# Altium PCB pdb-25.PcbDoc (part 4 of 4)
Units mil, origin at the board's own origin, x right, y up, seen from the top; angles counter-clockwise.
Board outline 5000 x 5500 mil, 4 copper layers (Top Layer, GND, 3V3, Bottom Layer), stack 23.756 mil thick; 410 components, 167 nets, 1014 pads, 884 vias.
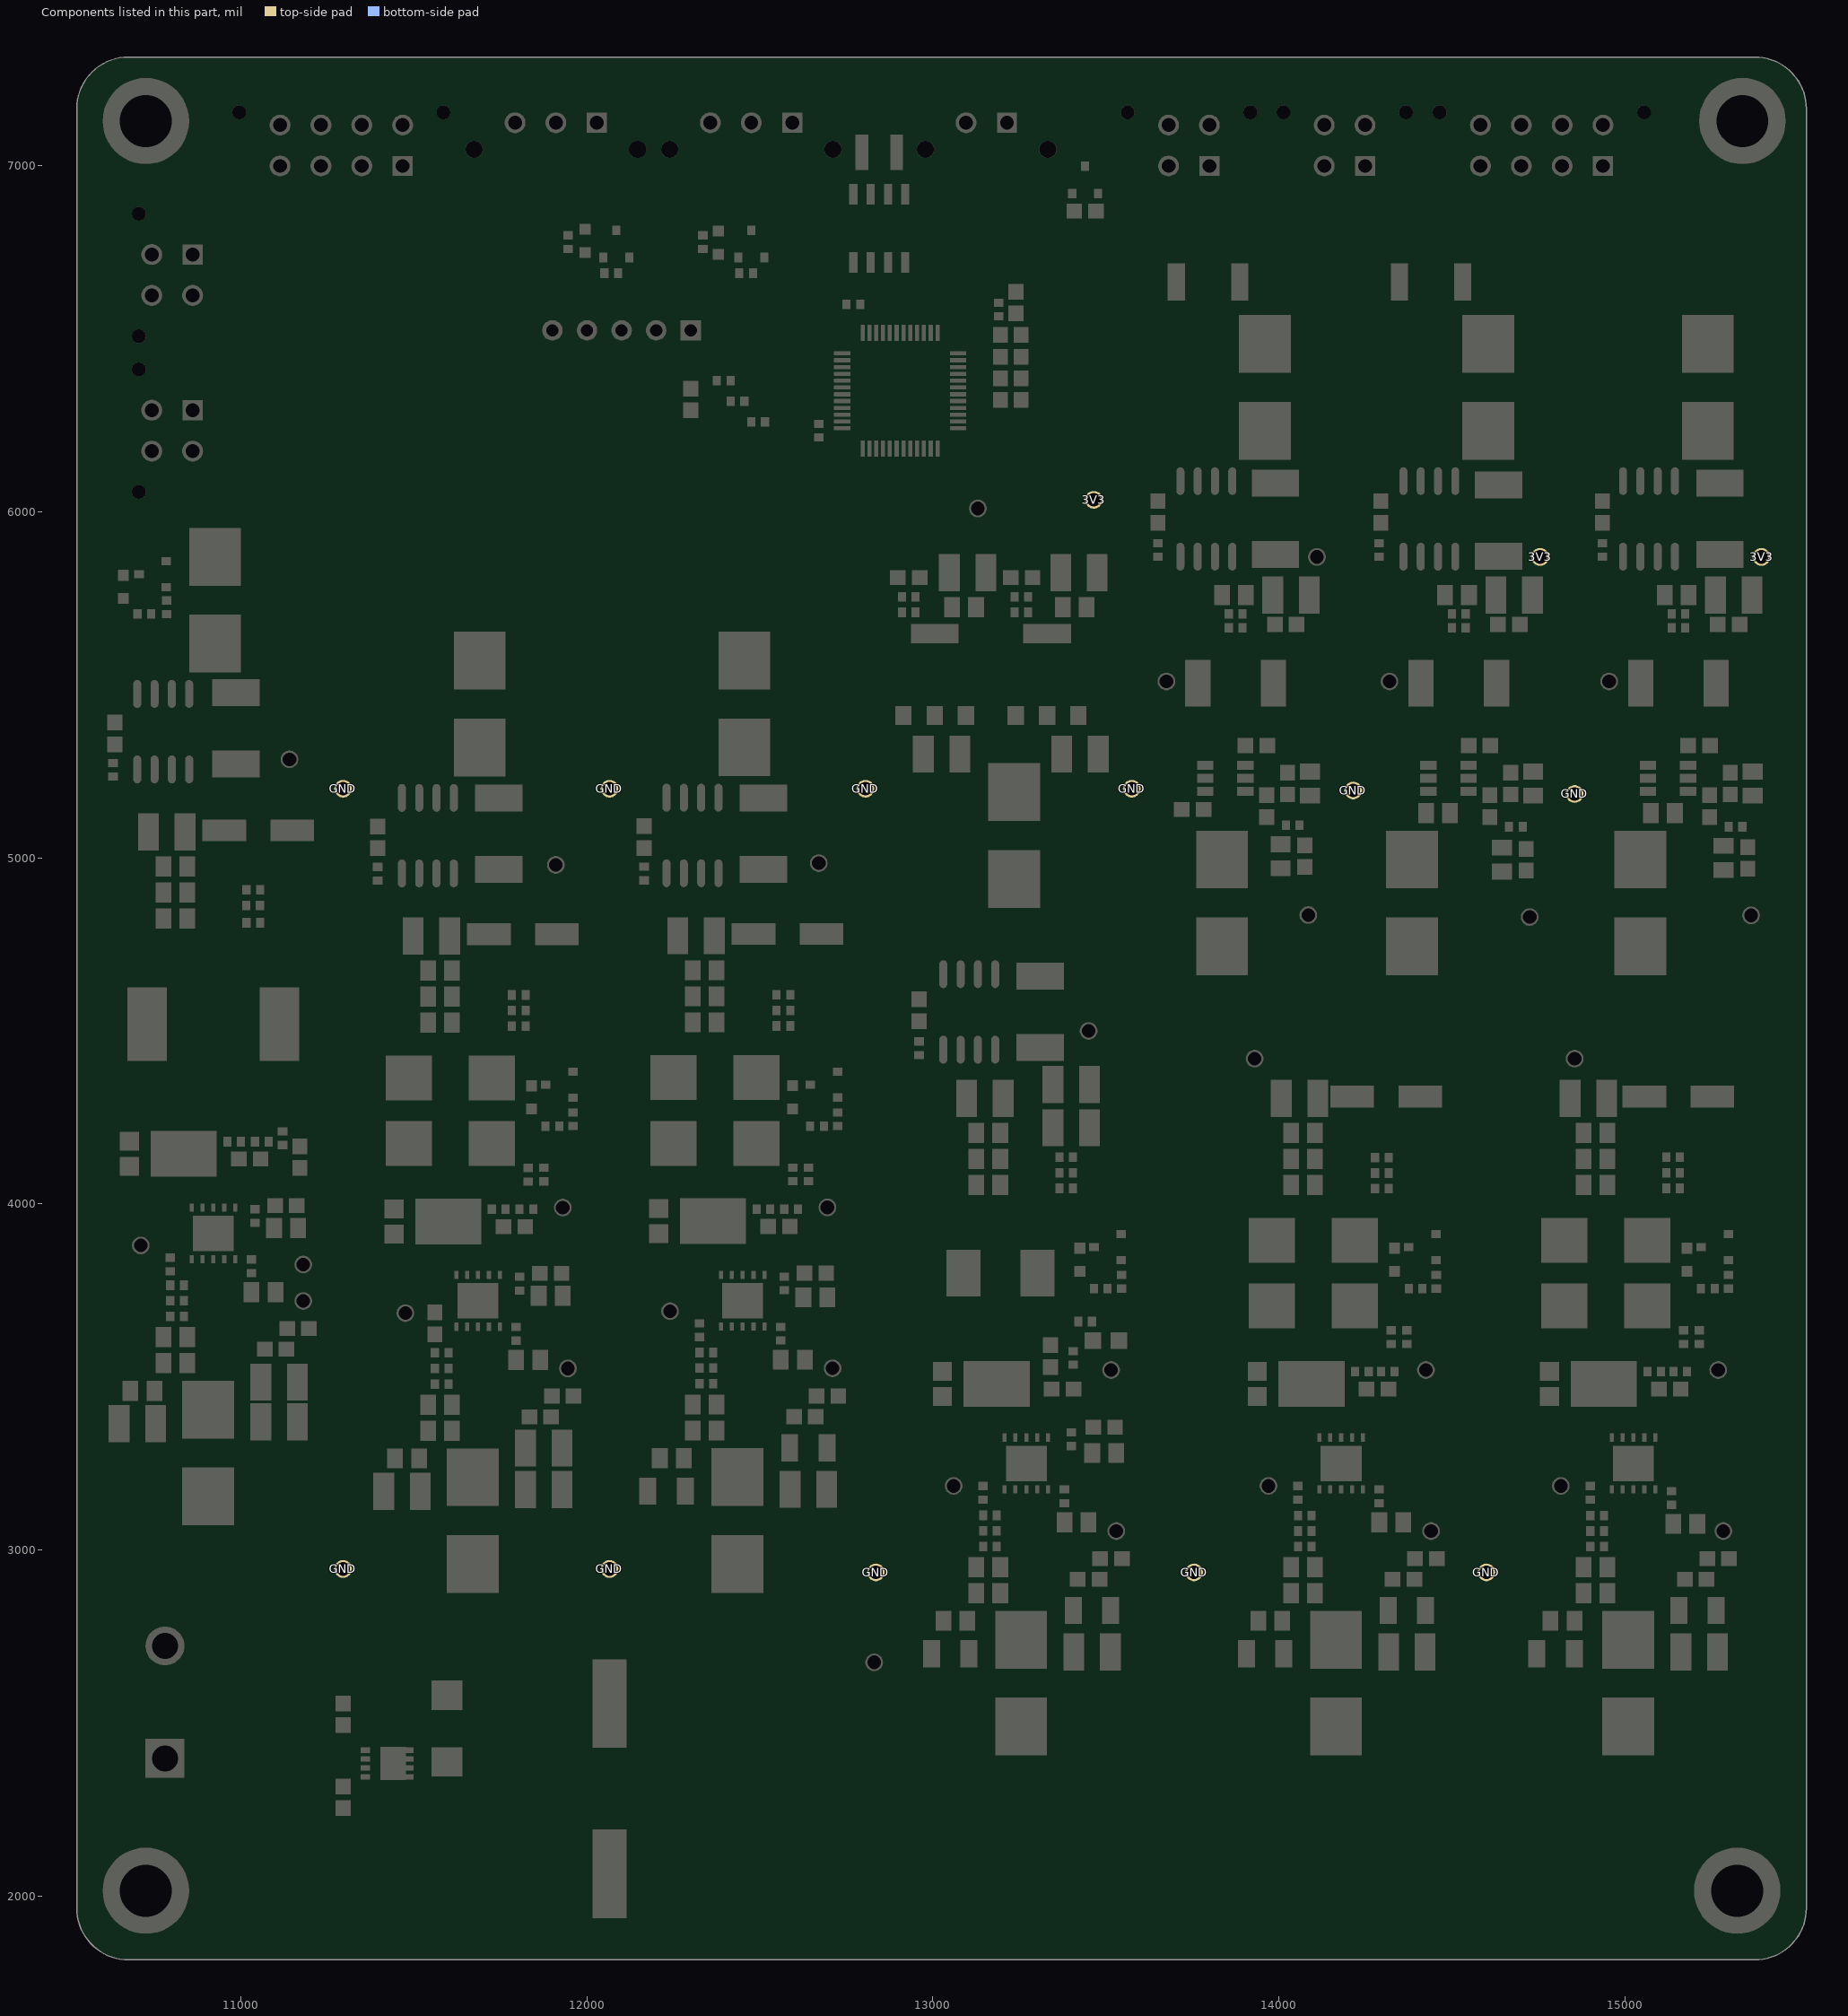
[diagram p6: the components of this part, seen from the top]

## Polygon pours and split planes (outlines as drawn) (continued)
VBAT_REST on Top Layer "VBAT_REST_L01_P119" (solid, remove dead copper, pour order 119): 12350,3323.37 12327.13,3300.5 12265,3300.5 12250,3285.5 12250,3230.5 12250,3120.5 12280,3090.5 12590,3090.5 12625,3125.5 12625,3405.5 12615,3415.5 12570,3415.5 12430,3555.5 12430,3661 12425,3666 12410,3666 12405,3661 12405,3626 12375,3596 12375,3595.5 12370,3590.5 12360,3590.5 12350,3580.5
SW_2 on Top Layer "SW_2_L01_P120" (solid, remove dead copper, pour order 120): 12300,3865.5 12280,3865.5 12265,3880.5 12265,4020.5 12180,4105.5 12180,4430.5 12190,4440.5 12315,4440.5 12325,4430.5 12325,4150.5 12465,4010.5 12465,3870.5 12433,3838.5 12432.5,3838.5 12425,3831 12425,3781 12410,3781 12410,3831 12377.5,3863.5 12350,3863.5 12330,3845.5 12320,3845.5
12V_REST on Top Layer "12V_REST_L01_P121" (solid, pour order 121): 12585,4995 12590,4990 12590,4980 12585,4975 12585,4885 12560,4860 12560,4185.5 12615,4130.5 12615,4095.5 12610,4090.5 12440,4090.5 12420,4110.5 12420,4425.5 12350,4495.5 12350,4705.5 12335,4720.5 12335,4830.5 12355,4850.5 12355,4975.5 12394.5,5015 12575,5015 12585,5005
VBAT_24 on Top Layer "VBAT_24_L01_P129" (solid, remove dead copper, pour order 129): 10820,3518.37 10797.13,3495.5 10735,3495.5 10720,3480.5 10720,3425.5 10720,3315.5 10750,3285.5 11060,3285.5 11095,3320.5 11095,3600.5 11085,3610.5 11040,3610.5 10900,3750.5 10900,3856 10895,3861 10880,3861 10875,3856 10875,3821 10845,3791 10845,3790.5 10840,3785.5 10830,3785.5 10820,3775.5
24V_BUCK on Top Layer "24V_BUCK_L01_P132" (solid, pour order 132): 11060,5300 11069,5291 11069,5279 11060,5270 11060,5200 11030,5170 11030,4775 11170,4635 11170,4415 11160,4405 11140,4405 11125,4390 11115,4390 11100,4405 11060,4405 11050,4415 11050,4564.7 10890,4725.5 10820,4795.5 10820,5005.5 10805,5020.5 10805,5130.5 10825,5150.5 10825,5275.5 10869.5,5320 11050,5320 11060,5310
3V3_AUTONLED_C on Top Layer "3V3_AUTONLED_C_L01_P154" (solid, pour order 154): 15329.65,6010 15345,6025.35 15345,6124.65 15319.65,6150 15319.65,6320 15309.65,6330 15179.65,6330 15169.65,6320 15169.65,6190 15134.65,6155 15134.65,6045 15169.65,6010
3V3_AUTONLED on Top Layer "3V3_AUTONLED_L01_P153" (solid, pour order 153): 15354.65,5859.82 15345,5850.18 15345,5840 15299.65,5794.65 15299.65,5585 15309.65,5575 15309.65,5435 15299.65,5425 15284.65,5425 15274.65,5415 15264.65,5415 15254.65,5425 15239.65,5425 15229.65,5435 15229.65,5570 15164.65,5635 15164.65,5795 15129.65,5830 15129.65,5910 15164.65,5945 15334.65,5945 15344.65,5935 15344.65,5880 15354.65,5870
12V_AUTONLED_FUSED on Top Layer "12V_AUTONLED_FUSED_L01_P151" (solid, pour order 151): 14970,5130.35 14970,4910 14975,4905 15115,4905 15120,4910 15120,5080 15100,5100 15099.65,5105 15099.65,5200 15089.65,5210 15049.65,5210
5V_BUCK on Top Layer "5V_BUCK_L01_P135" (solid, pour order 135): 14075.35,5859.82 14065.71,5850.18 14065.71,5840 14020.35,5794.65 14020.35,5585 14030.35,5575 14030.35,5435 14020.35,5425 14005.35,5425 13995.35,5415 13985.35,5415 13975.35,5425 13960.35,5425 13950.35,5435 13950.35,5570 13885.35,5635 13885.35,5795 13850.35,5830 13850.35,5910 13885.35,5945 14055.35,5945 14065.35,5935 14065.35,5880 14075.35,5870
5V_BUCK_C on Top Layer "5V_BUCK_C_L01_P136" (solid, pour order 136): 14050.35,6010 14060.35,6020 14060.35,6130 14040.35,6150 14040.35,6320 14030.35,6330 13900.35,6330 13890.35,6320 13890.35,6190 13855.35,6155 13855.35,6045 13890.35,6010
SW_5 on Top Layer "SW_5_L01_P134" (solid, pour order 134): 13695.54,5425.17 13695.53,5425.18 13695.53,5445.18 13715.53,5445.18 13715.54,5445.17 13735.35,5464.98 13735.35,5575 13740.35,5580 13805.35,5580 13810.35,5575 13810.35,5435 13745.35,5375 13745.35,5340 13755.35,5330 13755.35,5320 13745.35,5310 13745.35,5254.65 13755,5245 13815.35,5245 13820.35,5240 13820.35,5220 13815.35,5215 13740.35,5215 13680.35,5275 13680.35,5409.98
12V_AUTONLED on Top Layer "12V_AUTONLED_L01_P128" (solid, pour order 128): 14930,4380 14930,4400 14935,4405 14955,4405 14970,4420 14970,4830 14980,4840 15110,4840 15120,4830 15120,4470 15135,4455 15135,3715 15190,3660 15190,3625 15185,3620 15015,3620 14995,3640 14995,3955 14925,4025 14925,4235 14910,4250 14910,4360
SW_0 on Top Layer "SW_0_L01_P127" (solid, remove dead copper, pour order 127): 14875,3395 14855,3395 14840,3410 14840,3550 14755,3635 14755,3960 14765,3970 14890,3970 14900,3960 14900,3680 15040,3540 15040,3400 15008,3368 15007.5,3368 15000,3360.5 15000,3310.5 14985,3310.5 14985,3360.5 14952.5,3393 14925,3393 14905,3375 14895,3375
VBAT_AUTON on Top Layer "VBAT_AUTON_L01_P126" (solid, remove dead copper, pour order 126): 14925,2852.87 14902.13,2830 14840,2830 14825,2815 14825,2760 14825,2650 14855,2620 15165,2620 15200,2655 15200,2935 15190,2945 15145,2945 15005,3085 15005,3190.5 15000,3195.5 14985,3195.5 14980,3190.5 14980,3155.5 14950,3125.5 14950,3125 14945,3120 14935,3120 14925,3110
SW_1 on Top Layer "SW_1_L01_P124" (solid, remove dead copper, pour order 124): 14030,3395 14010,3395 13995,3410 13995,3550 13910,3635 13910,3960 13920,3970 14045,3970 14055,3960 14055,3680 14195,3540 14195,3400 14163,3368 14162.5,3368 14155,3360.5 14155,3310.5 14140,3310.5 14140,3360.5 14107.5,3393 14080,3393 14060,3375 14050,3375
VBAT_BUCKS on Top Layer "VBAT_BUCKS_L01_P123" (solid, remove dead copper, pour order 123): 14080,2852.87 14057.13,2830 13995,2830 13980,2815 13980,2760 13980,2650 14010,2620 14320,2620 14355,2655 14355,2935 14345,2945 14300,2945 14160,3085 14160,3190.5 14155,3195.5 14140,3195.5 14135,3190.5 14135,3155.5 14105,3125.5 14105,3125 14100,3120 14090,3120 14080,3110
NetJ3_1 on Top Layer "NETJ3_1_L01_P116" (solid, pour order 116): 10695,2455 10715,2475 11220,2475 11260,2435 11375,2435 11380,2430 11380,2365 11375,2360 11340,2360 11325,2375 11260,2375 11210,2325 10715,2325 10695,2345
GND on Bottom Layer "GND_L04_P178" (solid, pour order 178): 10525,1965 10525,7165 cw(c10675,7165) 10675,7315 15375,7315 cw(c15375,7165) 15525,7165 15525,1965 cw(c15375,1965) 15375,1815 10675,1815 cw(c10675,1965)
5V_LDO on Bottom Layer "5V_LDO_L04_P180" (solid, pour order 180): 12545,5920 12530,5935 12530,5990 12575,6035 12595,6035 12615,6015 12660,6015 12680,5995 12680,5970 12630,5920
VBAT_MCU on 3V3 "VBAT_MCU_L03_P177" (solid, remove dead copper, pour order 177): 10525,1965 10525,7165 cw(c10675,7165) 10675,7315 15375,7315 cw(c15375,7165) 15525,7165 15525,1965 cw(c15375,1965) 15375,1815 10675,1815 cw(c10675,1965)
GND on GND "GND_L02_P176" (solid, pour order 176): 10525,1965 10525,7165 cw(c10675,7165) 10675,7315 15375,7315 cw(c15375,7165) 15525,7165 15525,1965 cw(c15375,1965) 15375,1815 10675,1815 cw(c10675,1965)

## Silkscreen, mask and mechanical layers (free items; w line width, h text height)
Top Overlay:
  drawing of 2310 lines, arcs and shapes, not listed
  text "GND 5V" at 13065,6905 h30
  text "CANL CANH GND" at 11730,6900 h30
  text "CANL CANH GND" at 12290,6900 h30
  text "12V 12V 12V 12V" at 11150,6825 h30
  text "5V  5V" at 13655,6825 h30
  text "3V3 3V3" at 14085,6825 h30
  text "R   G   B  3V3" at 14570,6825 h30
  text "GND GND GND GND" at 11140,6770 h30
  text "GND GND" at 13640,6770 h30
  text "GND GND" at 14085,6770 h30
  text "GND GND GND GND" at 14540,6770 h30
  text "TX" at 11818,6758 h45
  text "RX" at 12208,6753 h45
  text "18V 18V" at 11035,6585 h30 r90
  text "GND GND" at 11090,6580 h30 r90
  text "24V 24V" at 11035,6135 h30 r90
  text "GND GND" at 11090,6130 h30 r90
  text "JD  AJ  MA  AL  SM  SN  JV" at 11398,5823 h40
  text "5V, 3V3 LDOS" at 13015,4790 h30
  text "5V BUCK" at 13790,4595 h30
  text "3V3 BUCK" at 14415,4595 h30
  text "3V3 (AUTON LED)" at 14965,4595 h30
  text "24V (POE)" at 10785,3000 h30
  text "18V (JETSON)" at 11510,2805 h30
  text "12V (FANS/USB HUBS)" at 12175,2805 h30
  text "7V (LDO SUPPLY)" at 13050,2335 h30
  text "12V (5V/3V3 BUCKS)" at 13920,2335 h30
  text "12V (AUTON LED)" at 14820,2335 h30
Bottom Overlay:
  drawing of 47 lines, arcs and shapes, not listed
Top 3D Body:
  lines w10: 2115,660 ccw(c2265,660) 2265,510 ; 10525,1965 ccw(c10675,1965) 10675,1815 15375,1815 ccw(c15375,1965) 15525,1965 15525,7165 ccw(c15375,7165) 15375,7315 10675,7315 ccw(c10675,7165) 10525,7165 10525,1965